# Altium PCB Photon.PcbDoc
Units mil, origin at the board's own origin, x right, y up, seen from the top; angles counter-clockwise.
Board outline 2000 x 1800 mil, 2 copper layers (Top Layer, Bottom Layer); 9 components, 9 nets, 42 pads, 0 vias.
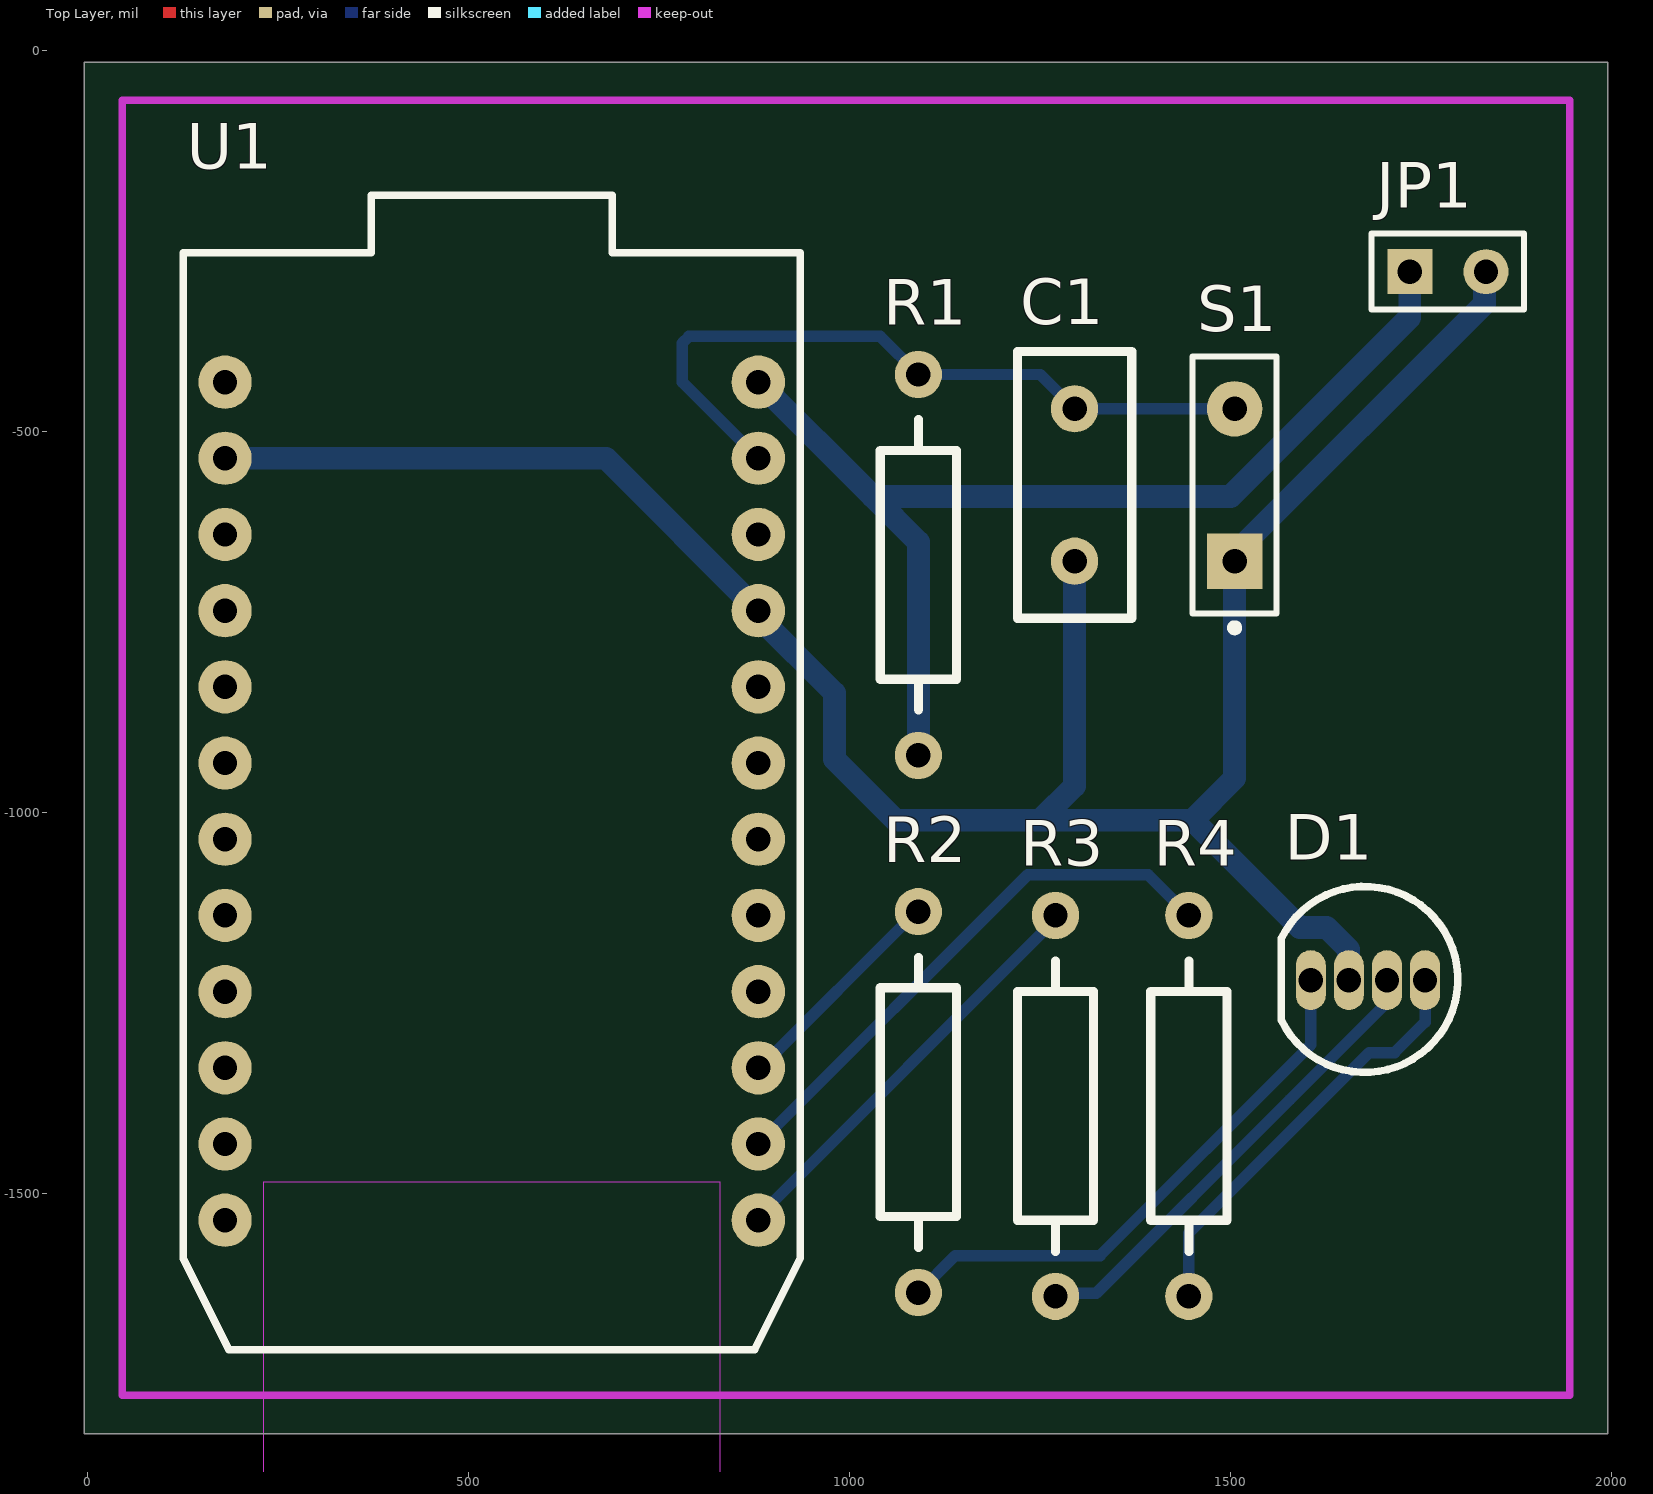
[diagram p0: Top Layer view]
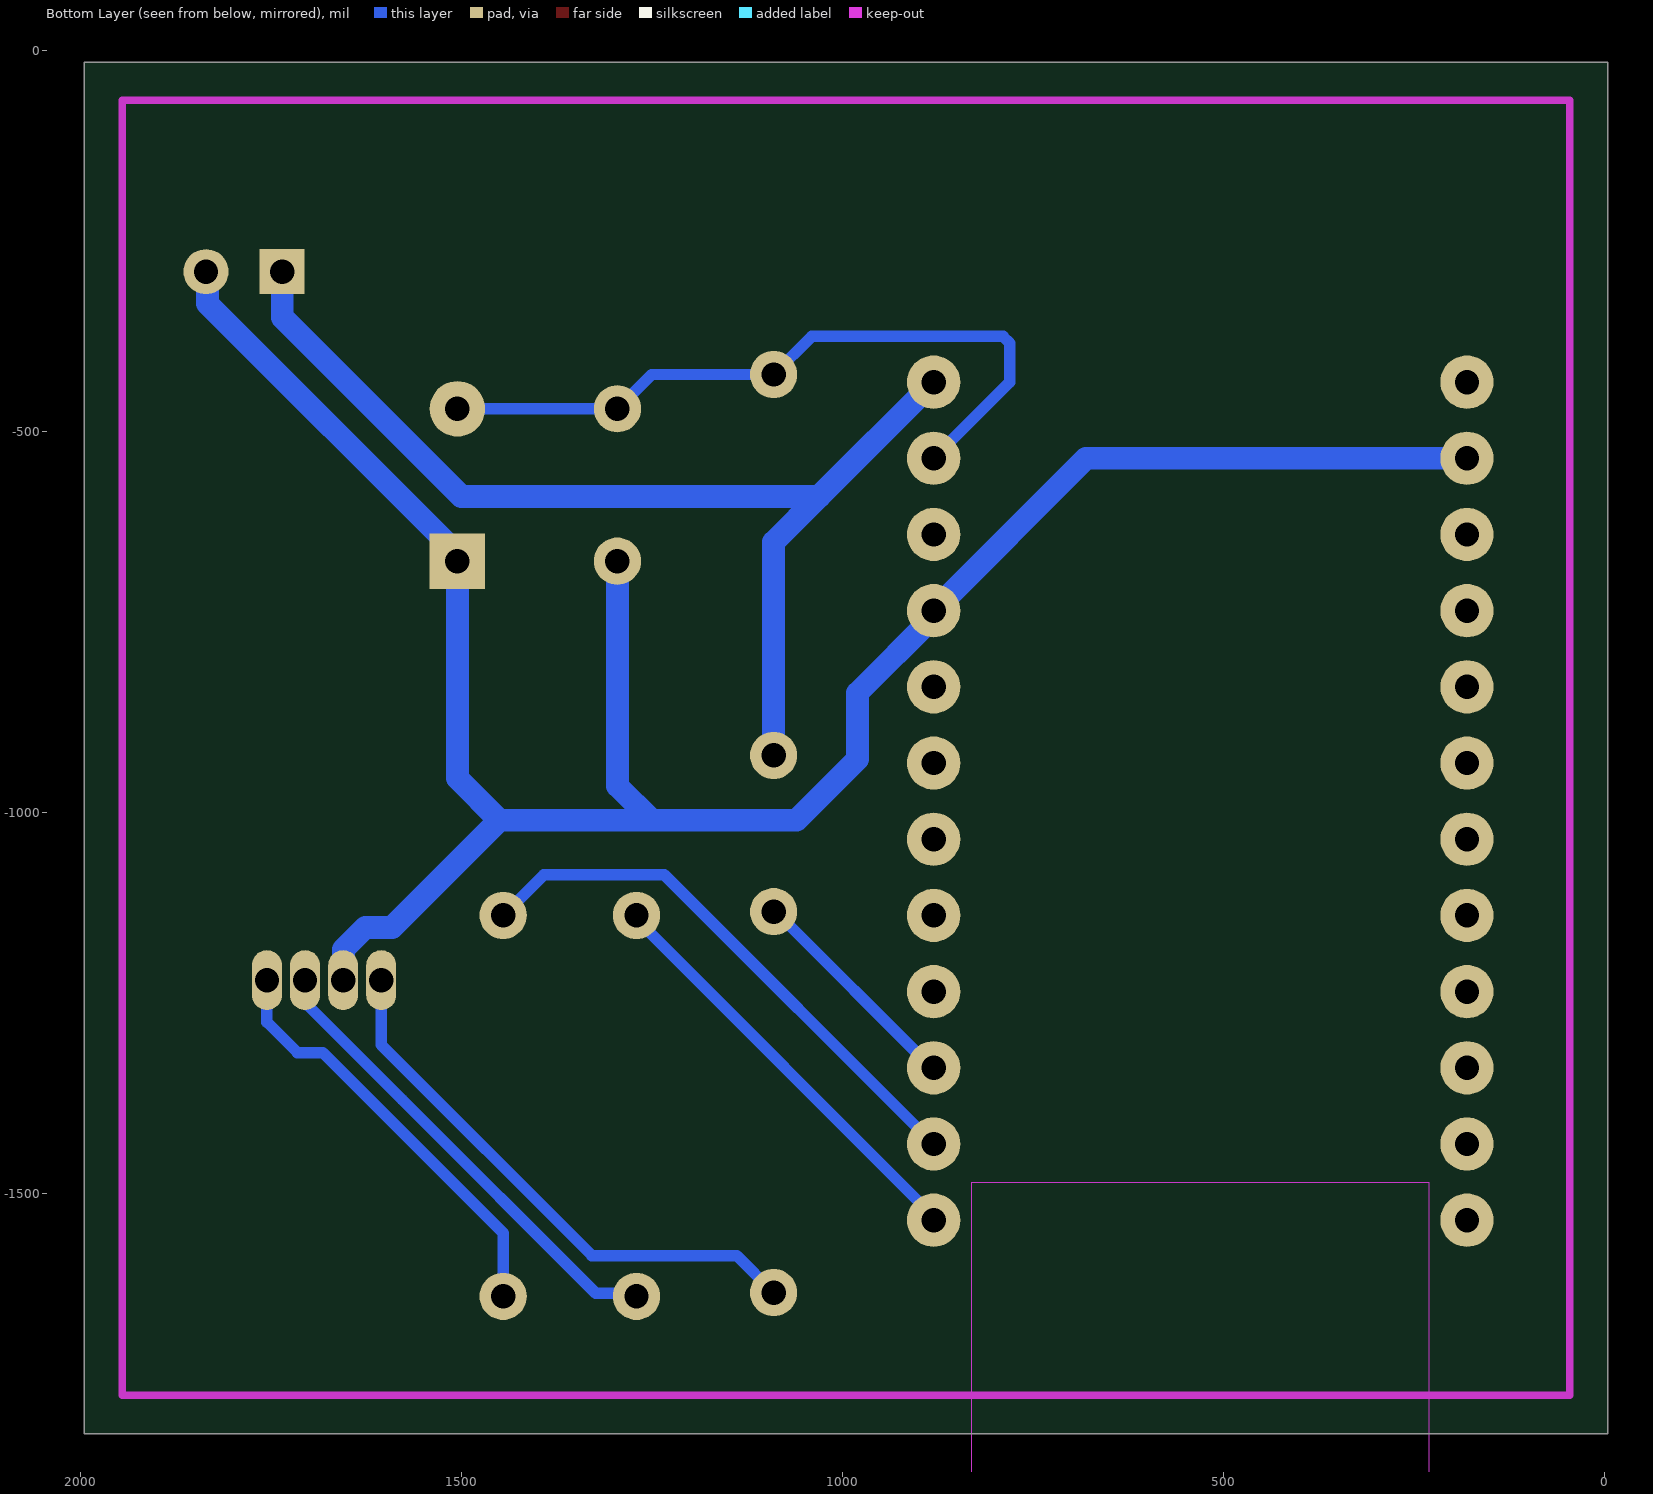
[diagram p1: Bottom Layer view, seen from below]

## Layer stack, top to bottom
Top Solder: solder mask 0.4, Solder Resist, Dk 3.5
Top Layer: signal copper 1.4
Dielectric 1: dielectric 12.6, FR-4, Dk 4.8
Bottom Layer: signal copper 1.4
Bottom Solder: solder mask 0.4, Solder Resist, Dk 3.5

## Board outline
-5,-1815 1995,-1815 1995,-15 -5,-15

## Design rules (kind name [scope] priority, off if disabled: settings)
Clearance [All] p1: gap=15 ignorepadtopadclearanceinfootprint=TRUE except(0: Arc-Text Arc-Hole Track-Text Track-Hole SMDPad-Text SMDPad-Hole THPad-Text THPad-Hole Via-Text Via-Hole Fill-Hole Poly-Hole Region-Hole Text-Hole; 10: Via-Via Via-Fill Via-Poly Via-Region Fill-Fill Fill-Poly Fill-Region Fill-Text Poly-Poly Poly-Region Poly-Text Region-Region Region-Text Text-Text)
HoleSize [All] p1: absolutevalues=TRUE maxlimit=32 minlimit=32 maxpercent=80.000 minpercent=20.000
PolygonConnect [All] p1: connectstyle=Relief reliefconductorwidth=10 reliefentries=4 polygonreliefangle="90 Angle" airgapwidth=10
RoutingVias [All] p1: holewidth=28 width=50 viastyle="Through Hole" minholewidth=28 minwidth=50 maxholewidth=28 maxwidth=50
SolderMaskExpansion [All] p1: expansion=4 istentingtop=FALSE
Width [All] p1: maxlimit=30 minlimit=15 preferedwidth=15 minimp=50.000000 maximp=50.000000 favimp=50.000000
29 further rules are at their usual default settings.

## Components (designator, comment, footprint, x,y, rotation, side; value= is the part's Value field where it differs from the comment)
C1 "0.1uF" RAD0.2 1295,-470 r270 top
D1 "RGB-LED" RGB-LED 1605,-1220 r90 top
JP1 "Header 2" HDR1X2 1735,-290 r0 top
R1 "10k" axial0.5 1090,-425 r270 top
R2 "220R" axial0.5 1090,-1630 r90 top
R3 "220R" axial0.5 1270,-1635 r90 top
R4 "220R" axial0.5 1445,-1635 r90 top
S1 "SW-PB" SPST-2 1505,-670 r90 top
U1 "Photon-NodeMCU" PHOTONNODE_TH 180,-435 r0 top

## Footprints (in the part's own frame and the unit in brackets; to place one, negate y for a bottom-side part, rotate by r counter-clockwise, add the part's x,y. Pads: shape width x height; smd on the part's side, far side on the other; paste and mask are expansions set on the pad)
axial0.5 [mil]
  round 62 hole 32: 1(0,0) 2(500,0)
  silkscreen extent 59,-50 440,50
HDR1X2 [mm]
  rect 1.5x1.5 hole 0.813: 1(0,0)
  round 1.5 hole 0.813: 2(2.54,0)
  silkscreen extent -1.27,-1.27 3.81,1.27
PHOTONNODE_TH [mil]
  round 70 hole 32: 1(0,0) 2(0,-100) 3(0,-200) 4(0,-300) 5(0,-400) 6(0,-500) 7(0,-600) 8(0,-700) 9(0,-800) 10(0,-900) 11(0,-1000) 12(0,-1100) 13(700,-1100) 14(700,-1000) 15(700,-900) 16(700,-800) 17(700,-700) 18(700,-600) 19(700,-500) 20(700,-400) 21(700,-300) 22(700,-200) 23(700,-100) 24(700,0)
  Keep-Out Layer region: 50,-1550 650,-1550 650,-1050 50,-1050
  silkscreen extent -55,-1270 755,245
RAD0.2 [mil]
  round 62 hole 32: 1(0,0) 2(200,0)
  silkscreen extent -75,-75 275,75
RGB-LED [mm]
  oval 2x1 hole 0.813: 1(0,0) 2(0,-1.27) 3(0,-2.54) 4(0,-3.81)
  silkscreen extent -3.07,-4.9 3.12,0.98
SPST-2 [mm] "Switch; 2 Leads"
  rect 1.85x1.85 hole 0.813: 1(0,0)
  round 1.85 hole 0.813: 2(5.08,0)
  silkscreen extent -2.35,-1.4 6.82,1.4

## Part data
C1: library part CAPACITOR, "Non-polarized Electrolytic Capacitor"
D1: "RGB Capable LED"
JP1: "Header, 2-Pin", Publisher="Altium Limited", Revision="17-Jul-2002: Re-released for DXP Platform."
R1 R2 R3 R4: library part RES1, "Resistor"
S1: "Push-button Switch", LatestRevisionDate=17-Jul-2002, LatestRevisionNote="Re-released for DXP Platform.", PackageDescription="Switch; 2 Leads", PackageReference=SPST-2, Published=24-Mar-1999, Publisher="Altium Limited"

## Nets (pads, with @x,y where several pads share a name; then routed paths per layer and width w, separated by ;. In a path a pad name is that pad's centre, name@x,y a point inside that pad or via, vN(x,y) a via of type N, cw(c..) or ccw(c..) an arc to the next point about the centre after c; other vN are vias at no path point)
+3.3V: JP1.1 R1.2 U1.24 | length 1439.3
  Bottom Layer w30: U1.24 1030,-585 ; R1.2 1090,-645 1030,-585 ; JP1.1 1735,-350 1500,-585 1030,-585
GND: C1.2 D1.2 JP1.2 S1.1 U1.2 U1.21 | length 3075.9
  Bottom Layer w30: U1.2 680,-535 U1.21 880,-743.08 980,-843.08 980,-930 1060,-1010 1250,-1010 ; C1.2 1295,-965 1250,-1010 ; D1.2 1654.69,-1219.69 1654.69,-1179.73 1625.58,-1150.63 1590.63,-1150.63 1450,-1010 ; JP1.2 1833.21,-291.79 1833.21,-331.79 1505,-660 1505,-955 1450,-1010 ; 1250,-1010 1450,-1010
NetD1_1: D1.1 R2.1 | length 734.6
  Bottom Layer w15: R2.1 1138.5,-1581.5 1328.5,-1581.5 1605,-1305 D1.1
NetD1_3: D1.3 R3.1 | length 624.1
  Bottom Layer w15: R3.1 1274.16,-1630.84 1323.5,-1630.84 1577.17,-1377.17 1700.34,-1254.01 1700.34,-1224.66 D1.3
NetD1_4: D1.4 R4.1 | length 562.9
  Bottom Layer w15: R4.1 1445,-1551.77 1681.77,-1315 1715,-1315 1755,-1275 D1.4
NetR2_2: R2.2 U1.15 | length 294.9
  Bottom Layer w15: U1.15 882.5,-1335 1087.5,-1130 R2.2
NetR3_2: R3.2 U1.13 | length 561.5
  Bottom Layer w15: U1.13 880,-1530 1270,-1140 R3.2
NetR4_2: R4.2 U1.14 | length 733.6
  Bottom Layer w15: U1.14 1233.5,-1081.5 1391.5,-1081.5 R4.2
R\E\S\E\T\: C1.1 R1.1 S1.2 U1.23 | length 960.6
  Bottom Layer w15: U1.23 780,-435 780,-383.79 788.79,-375 1040,-375 R1.1 1250,-425 C1.1 S1.2
pads on no net: U1.1 U1.3 U1.4 U1.5 U1.6 U1.7 U1.8 U1.9 U1.10 U1.11 U1.12 U1.16 U1.17 U1.18 U1.19 U1.20 U1.22

## Keep-outs
Keep-Out Layer:
  lines w10: 45,-1765 45,-65 1945,-65 1945,-1765 45,-1765